# EAGLE board SIMCOM-SIM39EA-MALE (EAGLE 9.5.1)
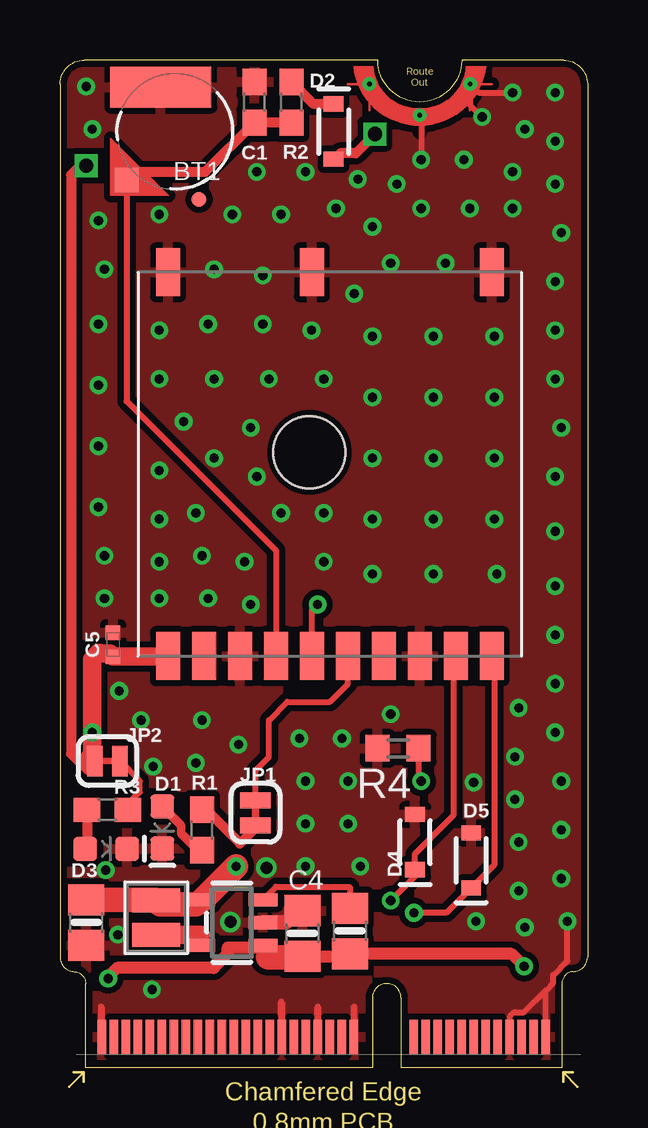
[diagram p0: board, top side]
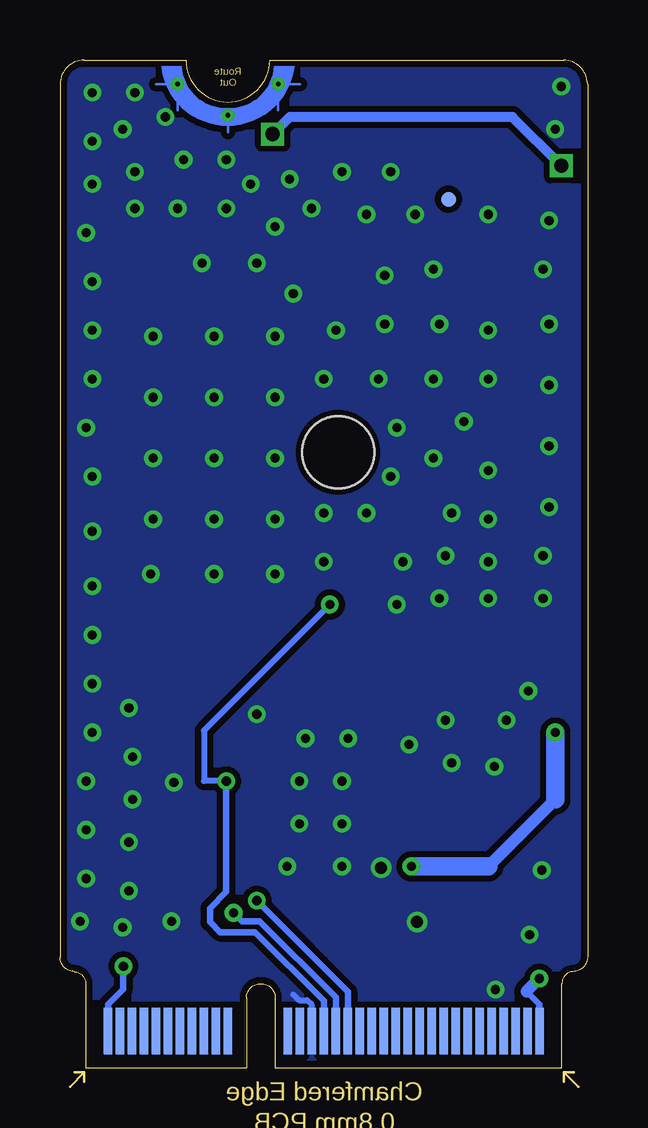
[diagram p1: board, bottom side, seen from below]

Size 22 x 42 mm. Coordinates in mm from the lower left corner, seen from the top.
Copper layers (1*16): Top 0.035mm / dielectric 1.5mm / Bottom 0.035mm
Design rules "SparkFun-2-layer-TIGHT *": minimum track width 7mil, minimum drill 15mil, track to track 7mil, track to pad 7mil, pad to pad 7mil, via to via 10mil, smd to smd 7mil, copper to edge 8mil, drill to drill 10mil, minimum pad ring 7mil, minimum via ring 7mil, stop-mask expansion 4mil, vias tented up to drill 25mil, thermal gap 10mil
Net classes: 0 default: width 0.254 mm; 1 vcc: width 0.305 mm

## Footprints (pad centres in the part's own frame; a part is rotated, then mirrored left to right if it is on the bottom)
ML414H_IV01E = smd 1 x 1: + 2.022,2.032 | smd 4.2 x 1.7: - 0.6,-1.85
0603 = smd 1.1 x 1: 1 -0.85,0; 2 0.85,0
0805-NO = smd 1.3 x 1.5: 1 -0.95,0; 2 0.95,0
0402-TIGHT = smd 0.6 x 0.6: 1 -0.5,0; 2 0.5,0
LED-0603 = smd 1 x 1: A -0.877,0; C 0.877,0
SOD-323 = smd 0.63 x 0.83: A 1.15,0; C -1.15,0
FIDUCIAL-MICRO = smd 0.635 x 0.635: 1 0,0
SMT-JUMPER_2_NC_TRACE_SILK = smd 0.66 x 1.27: 1 -0.521,0; 2 0.521,0
INDUCTOR_TAIYOYUDEN_NRH2412T = smd 1 x 2: 1 -0.725,0; 2 0.725,0
MICROMOD_4222_MALE = smd 0.35 x 1.45: 1 9.25,1.275; 3 8.75,1.275; 5 8.25,1.275; 7 7.75,1.275; 9 7.25,1.275; 11 6.75,1.275; 13 6.25,1.275; 15 5.75,1.275; 17 5.25,1.275; 19 4.75,1.275; 21 4.25,1.275; 23 3.75,1.275; 33 1.25,1.275; 35 0.75,1.275; 37 0.25,1.275; 39 -0.25,1.275; 41 -0.75,1.275; 43 -1.25,1.275; 45 -1.75,1.275; 47 -2.25,1.275; 49 -2.75,1.275; 51 -3.25,1.275; 53 -3.75,1.275; 55 -4.25,1.275; 57 -4.75,1.275; 59 -5.25,1.275; 61 -5.75,1.275; 63 -6.25,1.275; 65 -6.75,1.275; 67 -7.25,1.275; 69 -7.75,1.275; 71 -8.25,1.275; 73 -8.75,1.275; 75 -9.25,1.275 | smd 0.35 x 1.95 bottom: 2 9,1.525; 4 8.5,1.525; 6 8,1.525; 8 7.5,1.525; 10 7,1.525; 12 6.5,1.525; 14 6,1.525; 16 5.5,1.525; 18 5,1.525; 20 4.5,1.525; 22 4,1.525; 32 1.5,1.525; 34 1,1.525; 36 0.5,1.525; 38 0,1.525; 40 -0.5,1.525; 42 -1,1.525; 44 -1.5,1.525; 46 -2,1.525; 48 -2.5,1.525; 50 -3,1.525; 52 -3.5,1.525; 54 -4,1.525; 56 -4.5,1.525; 58 -5,1.525; 60 -5.5,1.525; 62 -6,1.525; 64 -6.5,1.525; 66 -7,1.525; 68 -7.5,1.525; 70 -8,1.525; 72 -8.5,1.525; 74 -9,1.525 | drill 0.2: GND1 1.9,41; GND2 4,39.7; GND3 6.1,41
R603 = smd 1 x 1.1: 1 -0.85,0; 2 0.85,0
SOT23-5 = smd 0.55 x 1.2: 1 -0.95,-1.3; 2 0,-1.3; 3 0.95,-1.3; 4 0.95,1.3; 5 -0.95,1.3
DFN1600X1600X750-13N = smd 2 x 1: 1 -8,6.75; 2 -8,5.25; 3 -8,3.75; 4 -8,2.25; 5 -8,0.75; 6 -8,-0.75; 7 -8,-2.25; 8 -8,-3.75; 9 -8,-5.25; 10 -8,-6.75; 11 8,-6.75; 12 8,0.75; 13 8,6.75 | hole 3: 0.5,0.85

## Placement (x,y rotation side)
BT1  6.8MM_COIN_CELL  [ML414H_IV01E]  4.8,39.01 180 top
C1  1.0uF  [0603]  8.1,40.23 90 top
C3  22uF  [0805-NO]  1.09,6.04 270 top
C4  10uF  [0805-NO]  10.11,5.59 90 top
C5  4.7uF  [0402-TIGHT]  2.21,17.63 90 top
D1  Yellow  [LED-0603]  4.27,10.01 270 top
D2  0.5A/40V/420mV  [SOD-323]  11.41,39.01 270 top
D3  RED  [LED-0603]  1.93,9.12 0 top
D4  3.6V  [SOD-323]  14.81,9.4 90 top
D5  3.6V  [SOD-323]  17.15,8.64 90 top
FD3  FIDUCIALUFIDUCIAL  [FIDUCIAL-MICRO]  5.79,36.19 0 top
FD4  FIDUCIALUFIDUCIAL  [FIDUCIAL-MICRO]  5.79,36.19 0 bottom
JP1  JUMPER-SMT_2_NC_TRACE_SILK  [SMT-JUMPER_2_NC_TRACE_SILK]  8.16,10.62 90 top
JP2  JUMPER-SMT_2_NC_TRACE_SILK  [SMT-JUMPER_2_NC_TRACE_SILK]  1.98,12.78 180 top
L1  2.2uH/NRH2412T2R2MNGH  [INDUCTOR_TAIYOYUDEN_NRH2412T]  4.02,6.25 90 top
MMM1  [MICROMOD_4222_MALE]  11,0 0 top
R1  1k  [0603]  5.92,9.91 90 top
R2  3.3k  [0603]  9.65,40.23 90 top
R3  1k  [0603]  1.98,10.74 0 top
R4  1.2Kohm 0603 resistor  [R603]  14.1,13.31 180 top
R6  100K  [0805-NO]  12.09,5.69 90 top
U2  LM3671MF-3.3/NOPB  [SOT23-5]  7.16,6.04 90 top
U3  SIM39EA  [DFN1600X1600X750-13N]  11.25,25.15 90 top

## Library data of the parts
BT1 = SparkFun-Batteries; PROD_ID: BATT-14267
C1 = SparkFun-Capacitors; PROD_ID: CAP-00868
C3 C4 L1 R6 U2 = microbuilder
C5 = SparkFun-Capacitors; PROD_ID: CAP-14240
D1 = SparkFun-LED; PROD_ID: DIO-09003
D2 = SparkFun-DiscreteSemi; PROD_ID: DIO-10955
D3 = SparkFun-LED; PROD_ID: DIO-00819
D4 D5 = SparkFun-DiscreteSemi; PROD_ID: DIO-08199
FD3 FD4 = SparkFun-Aesthetics
JP1 JP2 = SparkFun-Jumpers
MMM1 = Micromod_4222_Male
R1 R3 = SparkFun-Resistors; PROD_ID: RES-07856
R2 = SparkFun-Resistors; PROD_ID: RES-07851
R4 = dp_devices
U3 = SIM39EA; AVAILABILITY: Unavailable; DESCRIPTION: Ic Gps Accompany With Patch Antenna; MF: Simcom; MP: SIM39EA; PACKAGE: None; PRICE: None

## Nets
3.3V: C3.1 C5.1 D2.A JP2.2 L1.2 U2.4 U3.1
3D-FIX: MMM1.38 R4.1 U3.5
5.5V: C4.1 MMM1.2 MMM1.74 R6.1 U2.1
BACKUP: BT1.+ C1.1 R2.1 U3.4
EN: R6.2 U2.3
GND: BT1.- C1.2 C3.2 C4.2 C5.2 D1.C D3.C D4.A D5.A MMM1.1 MMM1.7 MMM1.33 MMM1.36 MMM1.39 MMM1.45 MMM1.75 MMM1.GND1 MMM1.GND2 MMM1.GND3 R4.2 U2.2 U3.3 U3.8 U3.11 U3.12 U3.13
N$1: JP2.1 R3.2
N$2: D1.A R1.1
N$3: D3.A R3.1
N$4: JP1.1 R1.2
N$5: L1.1 U2.5
N$6: D2.C R2.2
PPS: JP1.2 U3.6
RX2: D5.C MMM1.40 U3.10
TX2: D4.C MMM1.42 U3.9

## Tracks (layer width: path | path; a pad name or v marks a point on that pad's centre or on a via)
3.3V  (via drill 0.38, 0.6)
  Top 0.254: 5.95,6.99 U2.4 5.68,6.81 | 3.99,6.99 L1.2 4.18,6.81 | 11.7,38.11 11.45,37.86 D2.A
  Top 0.406: v1.09,37.59 0.84,37.59 0.46,37.22 0.46,13.08 0.97,12.57 1.23,12.57 | 1.23,12.78 JP2.2 | v13.13,38.91 12.33,38.11 11.7,38.11
  Top 0.762: U3.1 4.49,17.13 C5.1 2.07,17.27 1.68,17.27 1.6,17.27 1.35,17.02 v1.35,13.97 1.35,13.05 1.23,12.93 1.23,12.78 1.23,12.57
  Top 1.016: v7.34,8.38 5.95,6.99 | 3.99,6.99 C3.1 | 5.68,6.81 4.18,6.81
  Bottom 0.406: v1.09,37.59 3.13,39.62 12.42,39.62 v13.13,38.91
  Bottom 0.508: 1.35,11.18 4.14,8.38
  Bottom 0.762: 4.14,8.38 v7.34,8.38 | v1.35,13.97 1.35,11.18
3.3V1
  pour Top (rank 4, no thermals): 2.72,7.47 2.72,6.5 6.3,6.5 6.3,7.98 4.93,7.98 4.62,7.47
3D-FIX  (via drill 0.38)
  Top 0.254: U3.5 10.5,19.06 v10.75,19.3 | R4.1 14.95,12.05 v15.06,11.94
  Bottom 0.254: v10.75,19.3 16,14.05 16,11.94 v15.06,11.94
  Bottom 0.279: v15.06,11.94 15.06,7.32 15.75,6.63 15.75,6.07 15.32,5.64 13.87,5.64 11,2.77 MMM1.38
5.5V  (via drill 0.38)
  Top 0.254: 11.99,4.64 R6.1 | U2.1 8.46,4.79 8.67,4.59
  Top 0.508: v2.01,3.71 1.98,3.73 1.98,3.76 2.38,4.16 6.41,4.16 6.99,4.74 6.99,4.99 8.36,4.99 U2.1 | v19.36,4.22 18.83,4.74 R6.1 | C4.1 11.99,4.64
  Top 1.016: C4.1 10.06,4.59 8.67,4.59
  Bottom 0.279: 2.55,3.17 2.01,2.63 MMM1.74 | v19.36,4.22 19.36,3.27 19.99,2.63 MMM1.2
  Bottom 0.508: v2.01,3.71 2.55,3.17
5.5V1
  pour Top (rank 2, no thermals): 8.26,5.38 8.26,3.89 10.26,3.89 10.62,4.24 11.48,4.24 11.48,5.38
BACKUP
  Top 0.254: BT1.+ 2.78,27.78 9,21.55 U3.4
  Top 0.406: R2.1 C1.1 6.06,37.34 2.78,37.34 BT1.+
EN
  Top 0.254: U2.3 9.01,7.54 9.66,7.54 9.68,7.52 12.09,7.52 R6.2
GND  (via drill 0.38, 0.5)
  Top 0.254: v17.6,39.62 17.1,40.13 MMM1.GND3 17.46,40.64 v18.87,40.64 | v15.06,37.85 15.06,39.64 MMM1.GND2 14.2,39.7 MMM1.GND1 | MMM1.1 20.25,3.21 | v21.16,6.1 21.16,4.44 20.57,3.85 20.57,3.52 20.25,3.21 | MMM1.7 18.77,1.29 18.77,2.13 18.95,2.3 19.35,2.3 20.25,3.21 | MMM1.39 10.75,2.54 MMM1.39 | MMM1.33 12.25,2.52 12.27,2.54 12.27,1.29 MMM1.33 | MMM1.45 9.23,1.29 9.23,2.13 9.22,2.13 9.22,2.74 9.25,2.71 MMM1.45 | MMM1.75 1.75,2.49 1.7,2.54 1.7,1.32 MMM1.75
  Top 0.61: U2.2 9.42,6.04 10.11,6.73
  Bottom 0.254: MMM1.36 11.5,2.61 11.7,2.8 12.03,2.8 12.27,3.05
  other vias: 1.6,30.99 13.03,30.48 15.57,30.48 18.11,30.48 1.6,25.91 13.03,25.4 15.57,25.4 18.11,25.4 1.6,28.45 13.03,27.94 15.57,27.94 18.11,27.94 3.38,14.48 20.65,16 4.14,35.56 8.46,30.99 1.6,35.31 11,28.7 10.49,30.73 9.22,23.11 8.21,24.64 5.92,14.48 4.14,24.89 20.91,34.8 1.6,23.37 13.03,22.86 15.57,22.86 18.11,22.86 20.65,32.77 1.86,21.34 4.14,28.7 8.71,28.7 6.43,25.4 7.19,35.56 9.22,35.56 13.03,35.05 18.98,11.18 12.27,32.26 1.86,19.56 17.35,6.1 11,21.08 20.65,22.35 20.65,20.07 20.91,9.91 2.47,15.7 11,23.11 20.65,28.7 20.65,30.73 9.98,13.72 20.65,18.03 6.17,30.99 7.44,13.46 5.67,12.7 12.42,37.03 19.13,9.4 6.43,33.27 20.91,11.94 20.65,13.97 19.13,14.99 20.91,7.87 10.24,11.94 10.24,37.34 10.24,10.16 19.13,7.37 4.14,22.86 19.38,5.84 20.65,36.83 7.95,26.67 20.65,40.64 6.43,28.7 4.14,30.73 11.51,35.81 8.46,33.02 13.79,33.53 5.16,26.92 18.87,35.81 15.06,35.81 16.84,37.85 18.87,37.34 20.91,26.67 1.86,33.27 17.1,35.81 20.65,24.64 16.08,33.53 3.89,12.55 20.65,38.61 19.38,39.12 1.09,40.89 1.35,39.12 8.21,37.34 18.98,12.95 14.05,36.83 7.11,6.07 8.61,8.33 4.14,21.08 4.14,19.56 6.17,19.56 7.95,19.3 5.92,21.34 5.67,23.11 7.7,21.08 11.76,13.72 12.02,11.94 12.02,10.16 13.79,14.73 12.52,8.38 10.24,8.38 13.03,20.57 15.57,20.57 18.21,20.57 3.84,3.25 1.91,8.23 2.41,5.54 17.25,11.89
  pour Bottom (isolate 0.254): -0.18,42.67 22.68,42.67 22.68,0.51 -0.18,0.51
  pour Top (isolate 0.254): -0.18,42.67 22.68,42.67 22.68,0.51 -0.18,0.51
N$1
  Top 0.254: R3.2 2.83,10.98 3.33,11.48 3.33,11.95 JP2.1
N$2
  Top 0.356: D1.A 5.06,10.1 5.06,9.75 5.75,9.06 R1.1
N$3
  Top 0.406: R3.1 1.13,9.2 D3.A
N$4
  Top 0.406: R1.2 6.09,10.76 7.5,9.34 8.15,9.99 JP1.1
N$5
  Top 0.254: 5.86,5.52 U2.5
  Top 0.762: L1.1 5.86,5.52
N$6
  Top 0.406: D2.C 10.57,40.16 R2.2
N$7
  pour Top (rank 3, no thermals): 3.23,5.84 6.2,5.84 6.2,5.08 3.23,4.98
PPS
  Top 0.254: JP1.2 8.15,12.39 8.71,12.95 8.71,14.48 9.48,15.24 11.25,15.24 12,15.99 U3.6
RX2  (via drill 0.38)
  Top 0.254: U3.10 18.11,17.04 18.11,8.45 D5.C 16.11,6.45 v14.76,6.45
  Bottom 0.279: v14.76,6.45 14.4,6.1 13.68,6.1 10.5,2.92 MMM1.40
TX2  (via drill 0.38)
  Top 0.254: U3.9 16.4,17.04 16.4,10.51 14.81,8.91 D4.C 14.81,7.98 v13.79,6.96
  Bottom 0.279: v13.79,6.96 10,3.17 MMM1.42